# EAGLE board solar-snarfer (EAGLE 5.07)
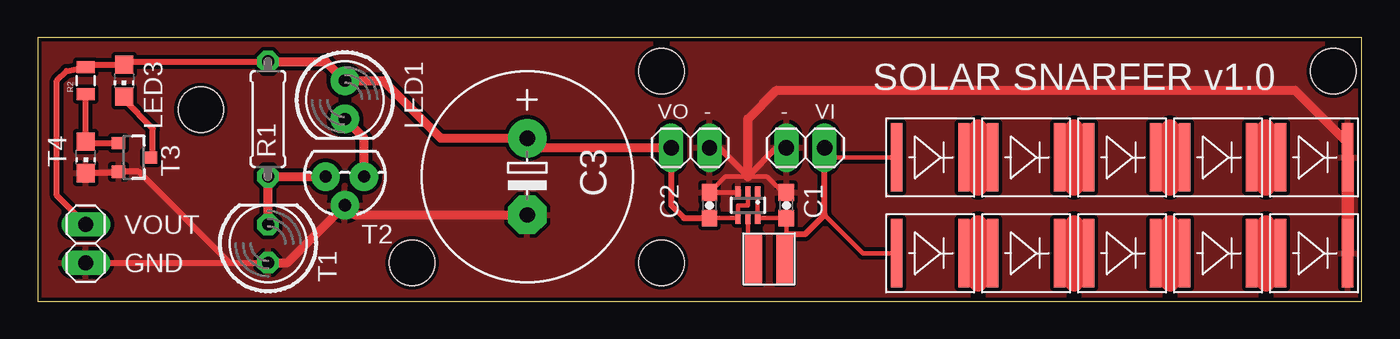
[diagram p0: board, top side]
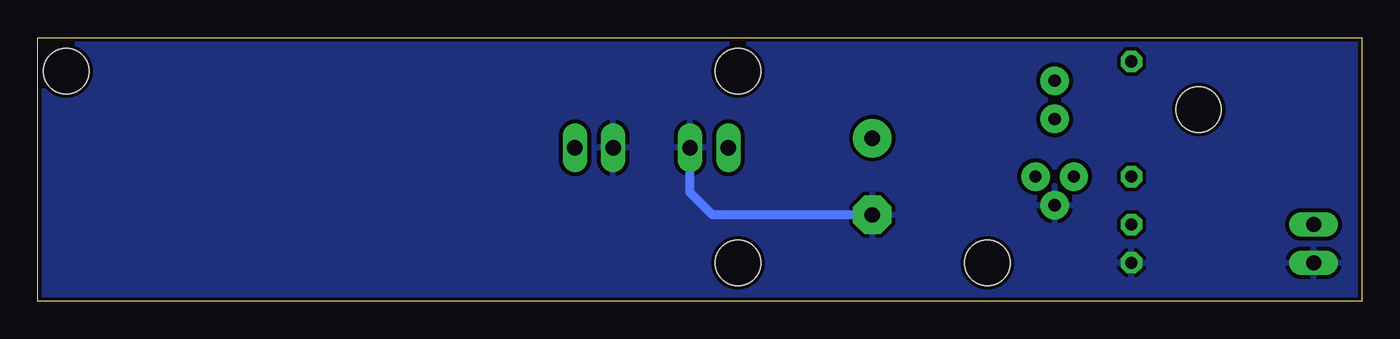
[diagram p1: board, bottom side, seen from below]

Size 87.61 x 17.45 mm. Coordinates in mm from the lower left corner, seen from the top.
Outline: 0,0 87.61,0 87.61,17.45 0,17.45 0,0
Copper layers (1*16): Top 0.035mm / dielectric 1.5mm / Bottom 0.035mm
Design rules "SparkFun *": minimum track width 8mil, minimum drill 20mil, track to track 10mil, track to pad 10mil, pad to pad 10mil, via to via 10mil, smd to smd 10mil, copper to edge 10mil, drill to drill 8mil, minimum pad ring 12mil, minimum via ring 10mil, stop-mask expansion 4mil, vias tented up to drill 25mil, thermal gap 10mil
Holes 3 mm at 85.72,15.24 24.77,2.54 41.27,2.54 41.27,15.24 10.79,12.7

## Footprints (pad centres in the part's own frame; a part is rotated, then mirrored left to right if it is on the bottom)
0603-CAP = smd 1.1 x 1: 1 -0.85,0; 2 0.85,0
E5-13 = drill 1.016 pad 2.54 round: + -2.54,0 | drill 1.016 pad 2.54 octagon: - 2.54,0
1X02 = drill 1.016 long: 1 -1.27,0; 2 1.27,0
M3015 = smd 1.12 x 3.2: P$1 -1.04,0; P$2 1.04,0
LED5MM = drill 0.813 pad 1.88 round: A -1.27,0; K 1.27,0
CHIP-LED0805 = smd 1.2 x 1.2: A 0,-1.05; C 0,1.05
0207/7 = drill 0.813 octagon: 1 -3.81,0; 2 3.81,0
0805 = smd 0.8 x 1.2: 1 -0.9,0; 2 0.9,0
PT5MM = drill 0.813 octagon: COLLECTOR 1.27,0; EMITTER -1.27,0
TO-92 = drill 0.813 pad 1.88 round: 1 -1.27,0; 2 0,1.905; 3 1.27,0
SOT23-3 = smd 0.8 x 0.9: 1 -0.95,-1; 2 0.95,-1; 3 0,1.1
SMD-PIN-DIODE-BIG = smd 4.55 x 0.75: ANODE 0,2.225; CATHODE 0,-2.225
SC70-6L = smd 0.35 x 0.8: 1 -0.65,-0.85; 2 0,-0.85; 3 0.65,-0.85; 4 0.65,0.85; 5 0,0.85; 6 -0.65,0.85

## Placement (x,y rotation side)
C1  10uF  [0603-CAP]  49.53,6.35 90 top
C2  10uF  [0603-CAP]  44.45,6.35 90 top
C3  [E5-13]  32.38,8.26 270 top
JP1  [1X02]  43.18,10.16 0 top
JP2  [1X02]  50.8,10.16 180 top
JP3  [1X02]  3.17,3.81 270 top
L1  INDUCTOR  [M3015]  48.39,2.79 180 top
LED1  [LED5MM]  20.32,13.34 270 top
LED3  [CHIP-LED0805]  5.71,14.61 180 top
R1  1M  [0207/7]  15.24,12.06 90 top
R2  1M  [0805]  3.17,14.61 90 top
T1  PHOTOTRANSISTOR  [PT5MM]  15.24,3.81 90 top
T2  MOSFET-NCHANNELPTH  [TO-92]  20.32,8.26 180 top
T3  MOSFET-NCHANNELSMD  [SOT23-3]  6.35,9.53 270 top
T4  PHOTOTRANSISTOR0805  [CHIP-LED0805]  3.17,9.53 180 top
U$1  TEMD5080  [SMD-PIN-DIODE-BIG]  65.41,3.17 90 top
U$2  TEMD5080  [SMD-PIN-DIODE-BIG]  65.41,9.53 90 top
U$3  TEMD5080  [SMD-PIN-DIODE-BIG]  59.05,3.17 90 top
U$4  TEMD5080  [SMD-PIN-DIODE-BIG]  59.05,9.53 90 top
U$7  TEMD5080  [SMD-PIN-DIODE-BIG]  84.45,3.17 90 top
U$8  TEMD5080  [SMD-PIN-DIODE-BIG]  84.45,9.53 90 top
U$9  TEMD5080  [SMD-PIN-DIODE-BIG]  78.11,3.17 90 top
U$10  TEMD5080  [SMD-PIN-DIODE-BIG]  78.11,9.53 90 top
U$11  TEMD5080  [SMD-PIN-DIODE-BIG]  71.75,9.53 90 top
U$12  TEMD5080  [SMD-PIN-DIODE-BIG]  71.75,3.17 90 top
U$13  TPS6122XDCK  [SC70-6L]  46.99,6.35 180 top

## Library data of the parts
C1 C2 LED1 R2 T2 T3 = SparkFun
C3 R1 = rcl
JP1-JP3 = pinhead
L1 U$1-U$4 U$7-U$13 = MakerBot
LED3 = led
T1 T4 = opto-trans-siemens

## Nets
GND: C1.2 C2.2 C3.- JP1.2 JP2.2 JP3.2 T1.EMITTER T2.2 T3.2 T4.C U$7.CATHODE U$8.CATHODE U$13.3
N$1: L1.P$2 U$13.5
N$3: U$1.ANODE U$3.CATHODE
N$4: U$9.ANODE U$12.CATHODE
N$5: U$10.ANODE U$11.CATHODE
N$6: U$8.ANODE U$10.CATHODE
N$7: U$7.ANODE U$9.CATHODE
N$8: U$2.ANODE U$4.CATHODE
N$9: U$2.CATHODE U$11.ANODE
N$10: U$1.CATHODE U$12.ANODE
N$18: R1.1 T1.COLLECTOR T2.3
N$19: LED1.K T2.1
N$21: LED3.C T3.3
N$22: R2.1 T3.1 T4.A
V+: C1.1 JP2.1 L1.P$1 U$3.ANODE U$4.ANODE U$13.1 U$13.6
VOUT: C2.1 C3.+ JP1.1 JP3.1 LED1.A LED3.A R1.2 R2.2 U$13.2 U$13.4

## Tracks (layer width: path | path; a pad name or v marks a point on that pad's centre or on a via)
GND
  Top 0.305: U$13.3 C2.2 45.51,8.26 46.99,8.26 48.26,8.26 49.31,7.2 C1.2 49.79,7.46
  Top 0.406: JP1.2 45.09,10.16 46.99,8.26 48.9,10.16 JP2.2 | T4.C 5.25,8.47 T3.2 6.67,8.57 12.7,2.54 | 12.7,2.54 T1.EMITTER | JP3.2 12.7,2.54
  Top 0.61: U$8.CATHODE 86.68,10.47 83.19,13.97 48.9,13.97 46.99,12.06 46.99,8.26 | C3.- 20.95,5.71 T2.2 16.51,2.54 T1.EMITTER
  Top 0.813: U$8.CATHODE U$7.CATHODE
  Bottom 0.61: C3.- 42.97,5.71 C2.2 JP1.2
  pour Top: 0,17.78 87.63,17.78 87.63,0 0,0
  pour Bottom: 0,17.78 87.63,17.78 87.63,0 0,0
N$1
  Top 0.305: U$13.5 46.99,3.15 L1.P$2
N$2
  Top 1.27: 81.28,7.62 81.28,11.43
N$3
  Top 0.305: U$1.ANODE U$3.CATHODE
N$4
  Top 0.305: U$9.ANODE U$12.CATHODE
N$5
  Top 0.305: U$10.ANODE U$11.CATHODE
N$6
  Top 0.305: U$10.CATHODE U$8.ANODE
N$7
  Top 0.305: U$9.CATHODE U$7.ANODE
N$8
  Top 0.305: U$2.ANODE U$4.CATHODE
N$9
  Top 0.305: U$2.CATHODE U$11.ANODE
N$10
  Top 0.305: U$1.CATHODE U$12.ANODE
N$11
  Top 1.27: 74.93,7.62 74.93,11.43
N$12
  Top 1.27: 68.58,7.62 68.58,11.43
N$13
  Top 1.27: 62.23,7.62 62.23,11.43
N$14
  Top 1.27: 62.23,1.27 62.23,5.08
N$15
  Top 1.27: 68.58,1.27 68.58,5.08
N$16
  Top 1.27: 74.93,1.27 74.93,5.08
N$17
  Top 1.27: 81.28,1.27 81.28,5.08
N$18
  Top 0.61: T2.3 R1.1 T1.COLLECTOR
N$19
  Top 0.61: T2.1 21.59,10.79 LED1.K
N$21
  Top 0.406: LED3.C 5.71,13.34 7.62,11.43 7.62,9.7 T3.3
N$22
  Top 0.406: R2.1 T4.A 3.27,10.47 T3.1
V+
  Top 0.305: U$13.1 U$13.6 C1.1 49.53,4.45 49.4,4.32 49.4,2.82 L1.P$1 49.4,2.77 | U$3.ANODE 54.61,3.17 52.07,5.71 | U$4.ANODE 52.7,9.53 JP2.1
  Top 0.406: JP2.1 52.07,5.71 50.8,4.45 49.53,4.45
VOUT
  Top 0.305: C2.1 U$13.4 46.34,6.33 46.35,6.35 46.99,6.35 U$13.2
  Top 0.406: C2.1 42.75,5.51 41.91,6.35 JP1.1 | R1.2 5.93,15.88 LED3.A 3.33,15.65 R2.2 1.91,15.24 1.27,14.61 1.27,6.99 JP3.1
  Top 0.61: JP1.1 33.02,10.16 C3.+ 26.67,10.79 22.86,14.61 LED1.A 19.05,15.88 R1.2

## Text on the board
tPlace: SOLAR SNARFER v1.0 | VO | - | - | VI | VOUT | GND